# Altium PCB isokey_right.PcbDoc (part 2 of 2)
Units mm, origin at the board's own origin, x right, y up, seen from the top; angles counter-clockwise.
Board outline 380.25 x 127.5 mm, 2 copper layers (Top Layer, Bottom Layer), stack 1.569 mm thick; 152 components, 91 nets, 418 pads, 0 vias.
Unrouted connection lines stored in the file: 221.
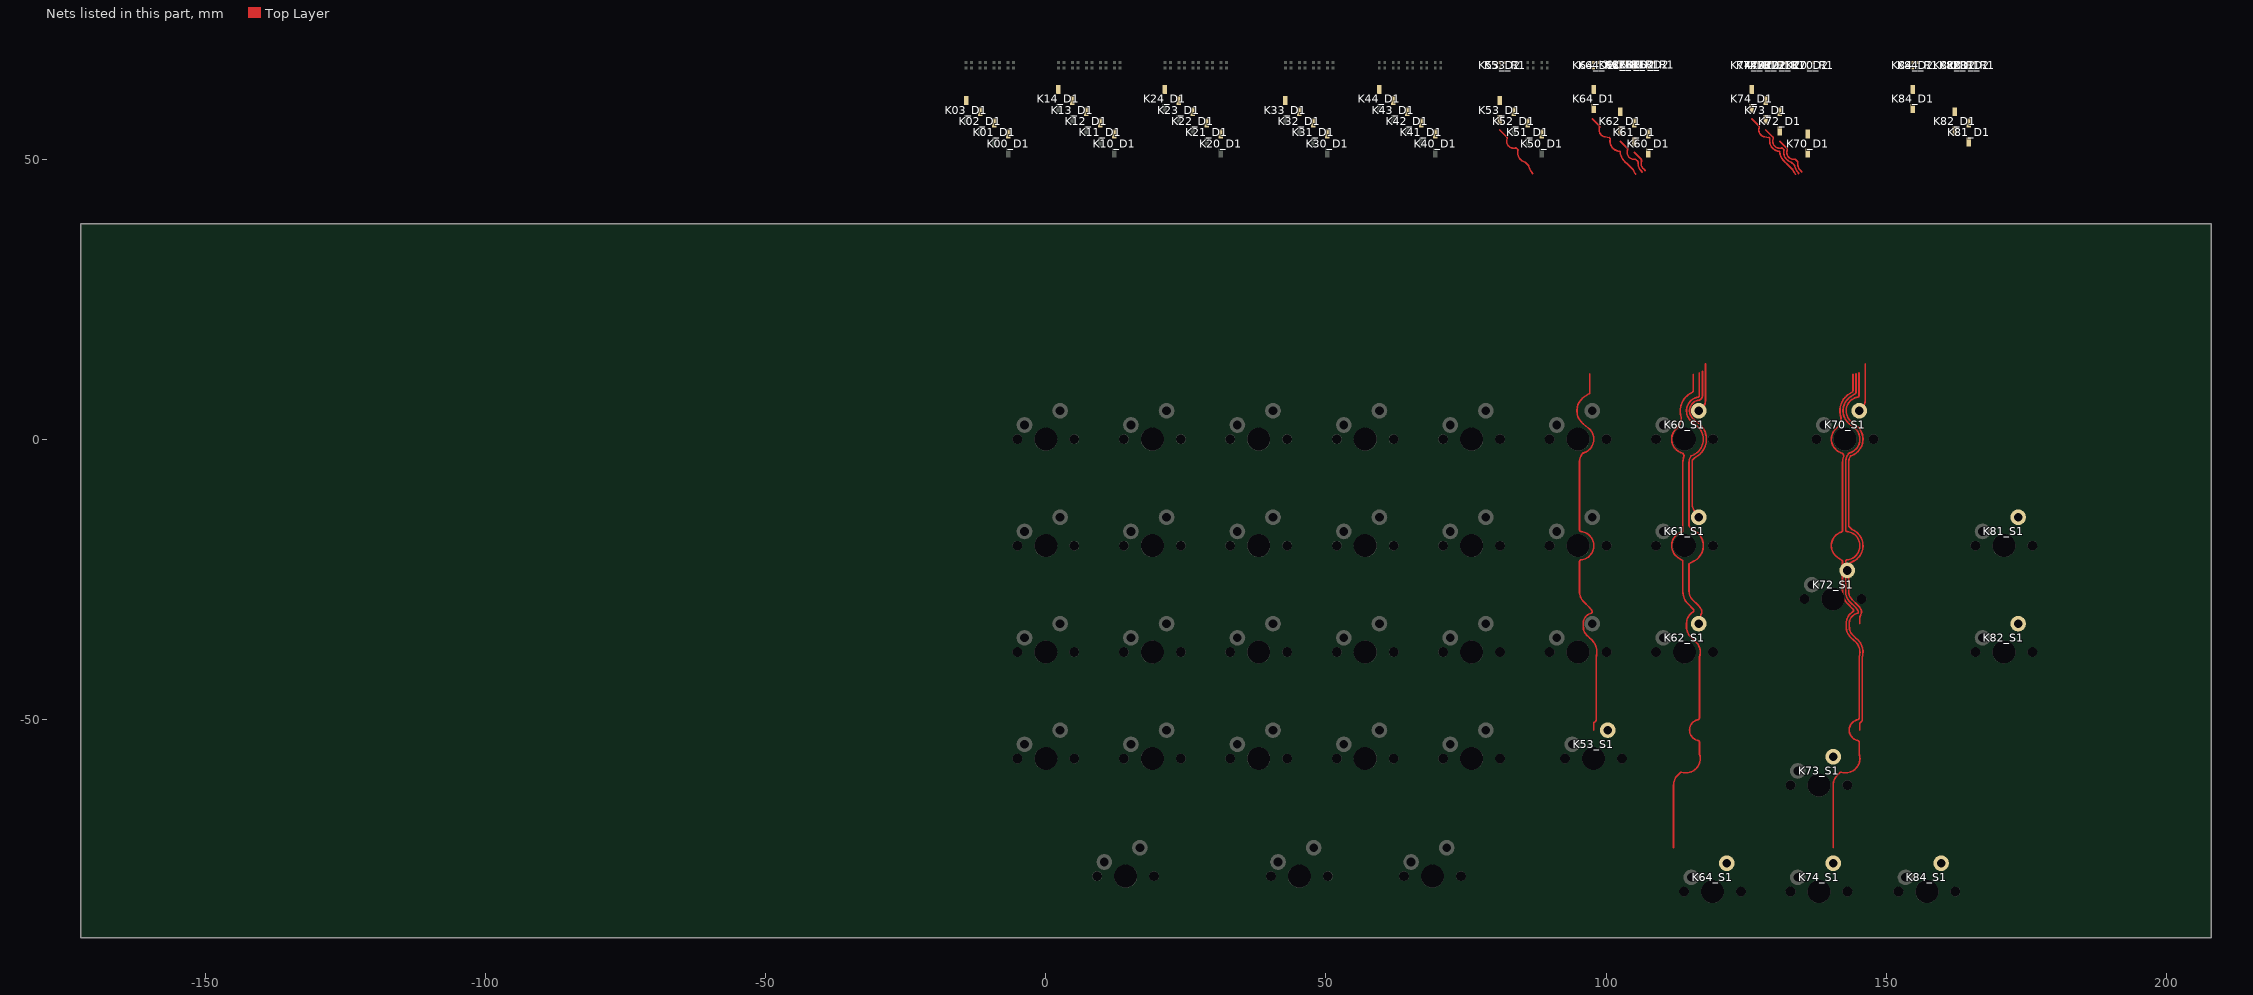
[diagram p2: the nets of this part, all layers, seen from the top]

## Nets (pads, with @x,y where several pads share a name; then routed paths per layer and width w, separated by ;. In a path a pad name is that pad's centre, name@x,y a point inside that pad or via, vN(x,y) a via of type N, cw(c..) or ccw(c..) an arc to the next point about the centre after c; other vN are vias at no path point) (continued)
NetK53_D1_2: K53_D1.2 K53_D2.2 K53_S1.2 | length 83.6
  Top Layer w0.3: 81,55.2 82.257,53.943 cw(c82.044,53.732) 82.326,53.629 ccw(c83.5,53.2) 83.755,51.976 cw(c83.815,51.682) 84.028,51.895 84.259,51.663 ; 84.26,51.662 ccw(c86,51.2) 85.549,49.457 86.115,48.891 cw(c85.901,48.681) 86.195,48.74 ccw(c88.5,49.2) 86.771,47.608 cw(c86.55,47.406) 86.85,47.407 ; 95.897,-32.763 cw(c97.79,-32.92) 97.307,-31.082 ccw(c97.229,-30.793) 97.495,-30.653 ccw(c95.25,-31.842) 97.046,-30.046 95.994,-28.994 cw(c97.79,-27.198) 95.25,-27.198 95.25,-21.833 cw(c95.55,-21.834) 95.518,-21.536 ccw(c95.25,-19) 95.517,-16.464 cw(c95.55,-16.166) 95.25,-16.167 95.25,-4.11 cw(c97.79,-4.11) 95.777,-2.562 cw(c96.014,-2.746) 95.932,-2.457 ccw(c95.25,0) 96.627,-2.146 ccw(c95.25,0) 96.823,2.007 95.91,2.722 cw(c96.095,2.958) 95.883,2.746 95.737,2.892 cw(c97.79,5.08) 96.208,7.629 96.958,8.095 ccw(c96.8,8.35) 97.1,8.346 97.1,8.348 97.1,11.657 ; 95.952,-32.439 ccw(c97.79,-32.92) 95.895,-33.054 95.897,-33.091 95.952,-33.939 ccw(c96.251,-33.919) 95.961,-33.993 ccw(c97.886,-33.493) 96.294,-34.686 ; 96.011,-34.157 ccw(c97.886,-33.493) 96.481,-34.901 97.055,-35.476 ccw(c97.266,-35.262) 97.087,-35.503 cw(c95.25,-38) 98.309,-37.5 cw(c95.25,-38) 98.229,-38.856 ccw(c98.518,-38.938) 98.218,-38.937 98.218,-50.025 cw(c97.668,-50.024) 97.94,-50.502 ccw(c98.09,-50.762) 97.79,-50.761 97.79,-51.92
NetK53_D2_1: K53_D2.1 K53_R1.2
NetK60_D1_2: K60_D1.2 K60_D2.2 K60_S1.2 | length 8.7
  Top Layer w0.3: K60_S1.2@116.79,5.08 117.006,5.296 ccw(c115.21,7.092) 117.75,7.092 117.75,13.45
NetK60_D2_1: K60_D2.1 K60_R1.2
NetK61_D1_2: K61_D1.2 K61_D2.2 K61_S1.2 | length 34.7
  Top Layer w0.3: 105,51.2 106.256,49.944 106.257,49.943 cw(c106.043,49.733) 106.329,49.644 106.306,49.571 ccw(c107.5,49.2) 106.815,48.154 cw(c106.65,47.904) 106.95,47.904 ; 115.258,3.956 ccw(c116.79,5.08) 115.666,3.548 ; 116.231,3.085 116.499,2.875 cw(c114.25,0) 115.808,-3.301 115.544,-3.565 ccw(c117.34,-5.361) 115.455,-3.658 ccw(c115.678,-3.859) 115.386,-3.791 ccw(c116.79,-4.11) 115.35,-4.11 115.35,-11.428 ccw(c117.89,-11.428) 116.094,-13.224 K61_S1.2@116.79,-13.92 ; 116.231,3.085 115.913,3.345 115.666,3.548 ; 116.35,6.928 cw(c116.79,5.08) 116.573,6.968 ; 117.2,12.154 117.2,7.795 cw(c116.35,7.795) 117.043,7.302 cw(c116.35,7.795) 117.017,7.268 cw(c116.35,7.795) 116.877,7.128 116.841,7.099 cw(c116.35,7.719) 116.65,6.987 cw(c116.537,7.265) 116.573,6.968 ; 115.666,3.548 cw(c116.79,5.08) 116.573,6.968
NetK61_D2_1: K61_D2.1 K61_R1.2
NetK62_D1_2: K62_D1.2 K62_D2.2 K62_S1.2 | length 58.7
  Top Layer w0.3: 102.5,53.2 103.757,51.943 ; 103.757,51.943 cw(c103.544,51.732) 103.826,51.629 ccw(c105,51.2) 105.255,49.976 105.622,49.609 cw(c105.409,49.398) 105.708,49.37 ccw(c107.5,49.2) 105.814,48.57 ccw(c107.5,49.2) 106.3,47.858 cw(c106.1,47.635) 106.4,47.635 ; 115.075,3.33 ccw(c116.79,5.08) 115.115,3.292 ; 116.65,11.885 116.65,7.795 cw(c116.35,7.795) 116.399,7.499 ccw(c116.79,5.08) 115.115,3.292 ; K62_S1.2@116.79,-32.92 K62_S1.2@116.79,-31.842 ; K62_S1.2@116.79,-31.841 cw(c117.09,-31.842) 116.806,-31.747 117.035,-31.063 ccw(c116.229,-30.793) 116.98,-30.395 ccw(c114.25,-31.842) 116.434,-29.656 115.384,-28.606 cw(c116.79,-27.198) 114.8,-27.198 114.8,-22.217 115.703,-21.739 ccw(c114.25,-19) 116.979,-17.529 ccw(c114.25,-19) 115.433,-16.135 cw(c115.549,-15.858) 115.339,-16.072 114.887,-15.62 cw(c115.1,-15.409) 114.8,-15.409 114.8,-4.11 cw(c116.79,-4.11) 115.103,-3.055 cw(c115.357,-3.215) 115.258,-2.931 ccw(c114.25,0) 115.963,-2.584 ccw(c114.25,0) 116.161,2.441 115.275,3.135 cw(c115.461,3.371) 115.25,3.158 115.128,3.28 ccw(c114.737,2.892) 115.115,3.292
NetK62_D2_1: K62_D2.1 K62_R1.2
NetK64_D1_2: K64_D1.2 K64_D2.2 K64_S1.2 | length 108.9
  Top Layer w0.3: 97.5,57.2 98.757,55.943 ; 98.757,55.943 cw(c98.544,55.732) 98.826,55.629 ccw(c100,55.2) 99.799,53.966 100.584,53.838 100.655,53.758 cw(c100.431,53.559) 100.726,53.505 ccw(c102.5,53.2) 102.5,51.4 ccw(c104.78,51.4) 102.892,50.121 103.054,49.882 ccw(c105,51.2) 103.713,49.234 cw(c103.548,48.983) 103.76,49.195 104.748,48.208 cw(c104.535,47.996) 104.813,48.11 ccw(c107.5,49.2) 105.3,47.311 ; 112.04,-72.92 112.04,-61.752 cw(c114.58,-61.752) 112.784,-59.956 113.223,-59.517 cw(c113.434,-59.731) 113.519,-59.443 ccw(c114.25,-57) 116.668,-56.19 116.668,-54.079 ccw(c116.368,-54.079) 116.425,-53.785 cw(c116.79,-51.92) 116.427,-50.055 ccw(c116.368,-49.761) 116.668,-49.761 116.668,-38.856 ; 115.55,11.561 115.55,8.656 cw(c115.25,8.656) 115.409,8.401 114.918,8.096 ccw(c116.79,5.08) 113.24,5.08 ccw(c117.405,5.08) 113.415,3.886 113.415,3.885 cw(c113.127,3.8) 113.427,3.798 cw(c110.827,3.844) 112.629,1.969 ccw(c114.25,0) 113.277,-2.357 113.622,-2.5 cw(c113.508,-2.777) 113.674,-2.527 113.714,-2.554 cw(c112.875,-3.247) 113.883,-2.838 cw(c113.605,-2.95) 113.887,-3.051 ccw(c116.79,-4.11) 113.7,-4.11 113.7,-16.28 cw(c113.4,-16.28) 113.49,-16.566 ccw(c114.25,-19) 112.886,-21.155 113.56,-21.582 cw(c113.4,-21.835) 113.7,-21.835 113.7,-27.198 ccw(c116.79,-27.198) 114.606,-29.384 115.579,-30.357 ; 115.579,-30.357 cw(c115.366,-30.568) 115.522,-30.824 ccw(c116.79,-32.92) 114.346,-33.088 cw(c114.047,-33.109) 114.346,-33.109 114.346,-33.493 ccw(c116.886,-33.493) 115.09,-35.289 115.697,-35.895 ccw(c115.908,-35.682) 115.732,-35.925 cw(c114.25,-38) 116.681,-37.231 cw(c114.25,-38) 116.682,-38.768
NetK64_D2_1: K64_D2.1 K64_R1.2
NetK70_D1_2: K70_D1.2 K70_D2.2 K70_S1.2 | length 8.7
  Top Layer w0.3: K70_S1.2@145.29,5.08 145.506,5.296 ccw(c143.71,7.092) 146.25,7.092 146.25,13.45
NetK70_D2_1: K70_D2.1 K70_R1.2
NetK72_D1_2: K72_D1.2 K72_D2.2 K72_S1.2 | length 58.7
  Top Layer w0.3: 131,53.2 132.257,51.943 cw(c132.044,51.732) 132.326,51.629 ccw(c133.5,51.2) 133.755,49.976 134.122,49.609 cw(c133.909,49.398) 134.208,49.37 ccw(c136,49.2) 134.314,48.57 ccw(c136,49.2) 134.8,47.858 cw(c134.6,47.635) 134.9,47.635 ; 143.575,3.33 ccw(c145.29,5.08) 143.615,3.292 ; 145.15,11.885 145.15,7.795 cw(c144.85,7.795) 144.899,7.499 ccw(c145.29,5.08) 143.615,3.292 ; 145.29,-32.92 145.29,-31.842 ; 145.29,-31.841 cw(c145.59,-31.842) 145.306,-31.747 145.535,-31.063 ccw(c144.729,-30.793) 145.48,-30.395 ccw(c142.75,-31.842) 144.934,-29.656 143.884,-28.606 cw(c145.29,-27.198) 143.3,-27.198 143.3,-22.217 144.203,-21.739 ccw(c142.75,-19) 145.479,-17.529 ccw(c142.75,-19) 143.933,-16.135 cw(c144.049,-15.858) 143.839,-16.072 143.387,-15.62 cw(c143.6,-15.409) 143.3,-15.409 143.3,-4.11 cw(c145.29,-4.11) 143.603,-3.055 cw(c143.857,-3.215) 143.758,-2.931 ccw(c142.75,0) 144.463,-2.584 ccw(c142.75,0) 144.661,2.441 143.775,3.135 cw(c143.961,3.371) 143.75,3.158 143.628,3.28 ccw(c143.237,2.892) 143.615,3.292
NetK72_D2_1: K72_D2.1 K72_R1.2
NetK73_D1_2: K73_D1.2 K73_D2.2 K73_S1.2 | length 83.6
  Top Layer w0.3: 128.5,55.2 129.757,53.943 cw(c129.544,53.732) 129.826,53.629 ccw(c131,53.2) 131.255,51.976 cw(c131.315,51.682) 131.528,51.895 131.759,51.663 ; 131.76,51.662 ccw(c133.5,51.2) 133.049,49.457 133.615,48.891 cw(c133.401,48.681) 133.695,48.74 ccw(c136,49.2) 134.271,47.608 cw(c134.05,47.406) 134.35,47.407 ; 143.397,-32.763 cw(c145.29,-32.92) 144.807,-31.082 ccw(c144.729,-30.793) 144.995,-30.653 ccw(c142.75,-31.842) 144.546,-30.046 143.494,-28.994 cw(c145.29,-27.198) 142.75,-27.198 142.75,-21.833 cw(c143.05,-21.834) 143.018,-21.536 ccw(c142.75,-19) 143.017,-16.464 cw(c143.05,-16.166) 142.75,-16.167 142.75,-4.11 cw(c145.29,-4.11) 143.277,-2.562 cw(c143.514,-2.746) 143.432,-2.457 ccw(c142.75,0) 144.127,-2.146 ccw(c142.75,0) 144.323,2.007 143.41,2.722 cw(c143.595,2.958) 143.383,2.746 143.237,2.892 cw(c145.29,5.08) 143.708,7.629 144.458,8.095 ccw(c144.3,8.35) 144.6,8.346 144.6,8.348 144.6,11.657 ; 143.452,-32.439 ccw(c145.29,-32.92) 143.395,-33.054 143.397,-33.091 143.452,-33.939 ccw(c143.751,-33.919) 143.461,-33.993 ccw(c145.386,-33.493) 143.794,-34.686 ; 143.511,-34.157 ccw(c145.386,-33.493) 143.981,-34.901 144.555,-35.476 ccw(c144.766,-35.262) 144.587,-35.503 cw(c142.75,-38) 145.809,-37.5 cw(c142.75,-38) 145.729,-38.856 ccw(c146.018,-38.938) 145.718,-38.937 145.718,-50.025 cw(c145.168,-50.024) 145.44,-50.502 ccw(c145.59,-50.762) 145.29,-50.761 145.29,-51.92
NetK73_D2_1: K73_D2.1 K73_R1.2
NetK74_D1_2: K74_D1.2 K74_D2.2 K74_S1.2 | length 108.9
  Top Layer w0.3: 126,57.2 127.257,55.943 cw(c127.044,55.732) 127.326,55.629 ccw(c128.5,55.2) 128.299,53.966 129.084,53.838 129.155,53.758 cw(c128.931,53.559) 129.226,53.505 ; 129.226,53.505 ccw(c131,53.2) 131,51.4 ccw(c133.28,51.4) 131.392,50.121 131.554,49.882 ccw(c133.5,51.2) 132.213,49.234 cw(c132.048,48.983) 132.26,49.195 133.248,48.208 cw(c133.035,47.996) 133.313,48.11 ccw(c136,49.2) 133.8,47.311 ; 140.54,-72.92 140.54,-61.752 cw(c143.08,-61.752) 141.284,-59.956 141.723,-59.517 cw(c141.934,-59.731) 142.019,-59.443 ccw(c142.75,-57) 145.168,-56.19 145.168,-54.079 ccw(c144.868,-54.079) 144.925,-53.785 cw(c145.29,-51.92) 144.927,-50.055 ccw(c144.868,-49.761) 145.168,-49.761 145.168,-38.856 ; 144.05,11.561 144.05,8.656 cw(c143.75,8.656) 143.909,8.401 143.418,8.096 ccw(c145.29,5.08) 141.74,5.08 ccw(c145.905,5.08) 141.915,3.886 141.915,3.885 cw(c141.627,3.8) 141.927,3.798 cw(c139.327,3.844) 141.129,1.969 ccw(c142.75,0) 141.777,-2.357 142.122,-2.5 cw(c142.008,-2.777) 142.174,-2.527 142.214,-2.554 cw(c141.375,-3.247) 142.383,-2.838 cw(c142.105,-2.95) 142.387,-3.051 ccw(c145.29,-4.11) 142.2,-4.11 142.2,-16.28 cw(c141.9,-16.28) 141.99,-16.566 ccw(c142.75,-19) 141.386,-21.155 142.06,-21.582 cw(c141.9,-21.835) 142.2,-21.835 142.2,-27.198 ccw(c145.29,-27.198) 143.106,-29.384 144.079,-30.357 ; 144.079,-30.357 cw(c143.866,-30.568) 144.022,-30.824 ccw(c145.29,-32.92) 142.846,-33.088 cw(c142.546,-33.109) 142.846,-33.109 142.846,-33.493 ccw(c145.386,-33.493) 143.59,-35.289 144.197,-35.895 ccw(c144.408,-35.682) 144.232,-35.925 cw(c142.75,-38) 145.181,-37.231 cw(c142.75,-38) 145.182,-38.768
NetK74_D2_1: K74_D2.1 K74_R1.2
NetK81_D1_2: K81_D1.2 K81_D2.2 K81_S1.2
NetK81_D2_1: K81_D2.1 K81_R1.2
NetK82_D1_2: K82_D1.2 K82_D2.2 K82_S1.2
NetK82_D2_1: K82_D2.1 K82_R1.2
NetK84_D1_2: K84_D1.2 K84_D2.2 K84_S1.2
NetK84_D2_1: K84_D2.1 K84_R1.2
R0: K00_D1.1 K10_D1.1 K20_D1.1 K30_D1.1 K40_D1.1 K50_D1.1 K60_D1.1 K70_D1.1
R1: K01_D1.1 K11_D1.1 K21_D1.1 K31_D1.1 K41_D1.1 K51_D1.1 K61_D1.1 K81_D1.1
R2: K02_D1.1 K12_D1.1 K22_D1.1 K32_D1.1 K42_D1.1 K52_D1.1 K62_D1.1 K72_D1.1 K82_D1.1
R3: K03_D1.1 K13_D1.1 K23_D1.1 K33_D1.1 K43_D1.1 K53_D1.1 K73_D1.1
R4: K14_D1.1 K24_D1.1 K44_D1.1 K64_D1.1 K74_D1.1 K84_D1.1
pads on no net: K00_S1.Hole K01_S1.Hole K02_S1.Hole K03_S1.Hole K10_S1.Hole K11_S1.Hole K12_S1.Hole K13_S1.Hole K14_S1.Hole K20_S1.Hole K21_S1.Hole K22_S1.Hole K23_S1.Hole K24_S1.Hole K30_S1.Hole K31_S1.Hole K32_S1.Hole K33_S1.Hole K40_S1.Hole K41_S1.Hole K42_S1.Hole K43_S1.Hole K44_S1.Hole K50_S1.Hole K51_S1.Hole K52_S1.Hole K53_S1.Hole K60_S1.Hole K61_S1.Hole K62_S1.Hole K64_S1.Hole K70_S1.Hole K72_S1.Hole K73_S1.Hole K74_S1.Hole K81_S1.Hole K82_S1.Hole K84_S1.Hole

## Silkscreen, mask and mechanical layers (free items; w line width, h text height)
Top Overlay:
  text "REV..prj_pcb" at -268.836,-51.176 h3
  text ".prj_name / .prj_status" at -274.336,-62.676 h2
Bottom Overlay:
  text "REV..prj_pcb" at -254.086,-54.176 h3
  text ".prj_name / .prj_status" at -251.336,-63.676 h2
Drawing:
  drawing of 2202 lines, arcs and shapes, not listed
  text "'.Layer_Name'" at 375.3,-211.053 h5
Assembly Top:
  text "'.Layer_Name'" at 375.3,-210.934 h5
Assembly Bottom:
  text "'.Layer_Name'" at 115.114,-211.342 h5
Note Top:
  text "'.Layer_Name'" at 375.3,-210.934 h5
Note Bottom:
  text "'.Layer_Name'" at 115.114,-211.175 h5
PCB_Note:
  drawing of 143 lines, arcs and shapes, not listed
  text "REV:" at 57.914,85.574 h0.8
  text "DWG. NO." at 33.354,85.495 h0.8
  text "1" at -284.049,85.112 h1.2
  text "2" at -257.049,85.112 h1.2
  text "3" at -232.049,85.112 h1.2
  text "4" at -207.049,85.112 h1.2
  text "5" at -182.049,85.112 h1.2
  text "6" at -157.049,85.112 h1.2
  text "7" at -132.049,85.112 h1.2
  text "8" at -105.049,85.112 h1.2
  text "9" at -76.049,85.112 h1.2
  text "10" at -51.049,85.112 h1.2
  text "11" at -26.049,85.112 h1.2
  text "12" at -1.049,85.112 h1.2
  text "13" at 23.951,85.112 h1.2
  text "15" at 73.951,85.112 h1.2
  text "16" at 103.951,85.112 h1.2
  text ".prj_pcb" at 58.164,84.074 h1.27
  text ".PCB_DWG_NO" at 36.664,83.824 h1.27
  text "T" at -295.031,81.486 h1.3
  text "H" at -293.93,81.486 h1.3
  text "I" at -292.66,81.486 h1.3
  text "S" at -292.152,81.486 h1.3
  text "D" at -290.5,81.486 h1.3
  text "O" at -289.23,81.486 h1.3
  text "C" at -287.833,81.486 h1.3
  text "U" at -286.562,81.486 h1.3
  text "M" at -285.292,81.486 h1.3
  text "E" at -283.81,81.486 h1.3
  text "N" at -282.624,81.486 h1.3
  text "T" at -281.396,81.486 h1.3
  text "A" at -279.787,81.486 h1.3
  text "N" at -278.602,81.486 h1.3
  text "D" at -277.331,81.486 h1.3
  text "T" at -275.595,81.486 h1.3
  text "H" at -274.494,81.486 h1.3
  text "E" at -273.224,81.486 h1.3
  text "D" at -271.573,81.486 h1.3
  text "A" at -270.302,81.486 h1.3
  text "T" at -269.117,81.486 h1.3
  text "A" at -268.058,81.486 h1.3
  text "D" at -266.364,81.486 h1.3
  text "I" at -265.094,81.486 h1.3
  text "S" at -264.628,81.486 h1.3
  text "C" at -263.443,81.486 h1.3
  text "L" at -262.172,81.486 h1.3
  text "O" at -261.198,81.486 h1.3
  text "S" at -259.801,81.486 h1.3
  text "E" at -258.615,81.486 h1.3
  text "D" at -257.43,81.486 h1.3
  text "H" at -255.694,81.486 h1.3
  text "E" at -254.423,81.486 h1.3
  text "R" at -253.238,81.486 h1.3
  text "E" at -252.01,81.486 h1.3
  text "I" at -250.824,81.486 h1.3
  text "N" at -250.316,81.486 h1.3
  text "O" at -248.58,81.486 h1.3
  text "R" at -247.183,81.486 h1.3
  text "REVISIONS" at 57.851,80.657 h1.5
  text "H" at -295.031,79.453 h1.3
  text "E" at -293.761,79.453 h1.3
  text "R" at -292.575,79.453 h1.3
  text "E" at -291.305,79.453 h1.3
  text "W" at -290.162,79.453 h1.3
  text "I" at -288.425,79.453 h1.3
  text "T" at -287.96,79.453 h1.3
  text "H" at -286.859,79.453 h1.3
  text "I" at -285.123,79.453 h1.3
  text "S" at -284.615,79.453 h1.3
  text "T" at -282.963,79.453 h1.3
  text "H" at -281.862,79.453 h1.3
  text "E" at -280.592,79.453 h1.3
  text "P" at -278.94,79.453 h1.3
  text "R" at -277.755,79.453 h1.3
  text "O" at -276.485,79.453 h1.3
  text "P" at -275.112,79.453 h1.3
  text "E" at -273.926,79.453 h1.3
  text "R" at -272.74,79.453 h1.3
  text "T" at -271.512,79.453 h1.3
  text "Y" at -270.412,79.453 h1.3
  text "O" at -268.76,79.453 h1.3
  text "F" at -267.405,79.453 h1.3
  text "A" at -265.796,79.453 h1.3
  text "L" at -264.61,79.453 h1.3
  text "T" at -263.679,79.453 h1.3
  text "I" at -262.578,79.453 h1.3
  text "U" at -262.07,79.453 h1.3
  text "M" at -260.8,79.453 h1.3
  text "L" at -258.852,79.453 h1.3
  text "I" at -257.878,79.453 h1.3
  text "M" at -257.37,79.453 h1.3
  text "I" at -255.93,79.453 h1.3
  text "T" at -255.422,79.453 h1.3
  text "E" at -254.321,79.453 h1.3
  text "D" at -253.135,79.453 h1.3
  text "A" at -251.399,79.453 h1.3
  text "N" at -250.214,79.453 h1.3
  text "D" at -248.943,79.453 h1.3
  text "M" at -247.165,79.453 h1.3
  text "A" at -245.683,79.453 h1.3
  text "Y" at -244.54,79.453 h1.3
  text "ZONE" at 17.592,77.482 h1.5
  text "REV" at 25.974,77.482 h1.5
  text "DATE" at 87.442,77.482 h1.5
  text "B" at -295.031,77.421 h1.3
  text "E" at -293.845,77.421 h1.3
  text "F" at -292.152,77.421 h1.3
  text "R" at -291.051,77.421 h1.3
  text "E" at -289.78,77.421 h1.3
  text "E" at -288.637,77.421 h1.3
  text "L" at -287.452,77.421 h1.3
  text "Y" at -286.478,77.421 h1.3
  text "D" at -284.784,77.421 h1.3
  text "I" at -283.514,77.421 h1.3
  text "S" at -283.048,77.421 h1.3
  text "T" at -281.862,77.421 h1.3
  text "R" at -280.779,77.421 h1.3
  text "I" at -279.551,77.421 h1.3
  text "B" at -279.043,77.421 h1.3
  text "U" at -277.857,77.421 h1.3
  text "T" at -276.587,77.421 h1.3
  text "E" at -275.486,77.421 h1.3
  text "D" at -274.3,77.421 h1.3
  text "I" at -272.564,77.421 h1.3
  text "N" at -272.056,77.421 h1.3
  text "W" at -270.362,77.421 h1.3
  text "H" at -268.626,77.421 h1.3
  text "O" at -267.398,77.421 h1.3
  text "L" at -266.001,77.421 h1.3
  text "E" at -265.027,77.421 h1.3
  text "." at -263.841,77.421 h1.3
  text "N" at -262.867,77.421 h1.3
  text "O" at -261.597,77.421 h1.3
  text "R" at -259.692,77.421 h1.3
  text "I" at -258.464,77.421 h1.3
  text "G" at -257.955,77.421 h1.3
  text "H" at -256.558,77.421 h1.3
  text "T" at -255.33,77.421 h1.3
  text "S" at -254.229,77.421 h1.3
  text "A" at -252.578,77.421 h1.3
  text "R" at -251.392,77.421 h1.3
  text "E" at -250.122,77.421 h1.3
  text "DESCRIPTION" at 51.755,77.355 h1.5
  text "APPROVED" at 100.269,77.355 h1.5
  text "R" at -295.031,75.388 h1.3
  text "E" at -293.761,75.388 h1.3
  text "S" at -292.575,75.388 h1.3
  text "E" at -291.39,75.388 h1.3
  text "R" at -290.204,75.388 h1.3
  text "V" at -288.934,75.388 h1.3
  text "E" at -287.748,75.388 h1.3
  text "D" at -286.562,75.388 h1.3
  text "O" at -284.826,75.388 h1.3
  text "R" at -283.429,75.388 h1.3
  text "E" at -281.65,75.388 h1.3
  text "X" at -280.465,75.388 h1.3
  text "P" at -279.322,75.388 h1.3
  text "R" at -278.136,75.388 h1.3
  text "E" at -276.866,75.388 h1.3
  text "S" at -275.68,75.388 h1.3
  text "S" at -274.494,75.388 h1.3
  text "O" at -272.843,75.388 h1.3
  text "R" at -271.446,75.388 h1.3
  text "I" at -269.71,75.388 h1.3
  text "M" at -269.201,75.388 h1.3
  text "P" at -267.719,75.388 h1.3
  text "L" at -266.534,75.388 h1.3
  text "I" at -265.602,75.388 h1.3
  text "E" at -265.094,75.388 h1.3
  text "D" at -263.908,75.388 h1.3
  text "W" at -262.215,75.388 h1.3
  text "A" at -260.479,75.388 h1.3
  text "R" at -259.293,75.388 h1.3
  text "A" at -258.023,75.388 h1.3
  text "N" at -256.837,75.388 h1.3
  text "T" at -255.609,75.388 h1.3
  text "E" at -254.508,75.388 h1.3
  text "E" at -253.322,75.388 h1.3
  text "G" at -251.767,75.388 h1.3
  text "I" at -250.369,75.388 h1.3
  text "V" at -249.861,75.388 h1.3
  text "E" at -248.676,75.388 h1.3
  text "N" at -247.49,75.388 h1.3
  text "." at -246.262,75.388 h1.3
  text "A" at 26.736,74.053 h1.5
  text "ORIGINAL" at 53.66,74.053 h1.5
  text "A" at -297.049,64.112 h1.2
  text "A" at 114.951,64.112 h1.2
  text "PCB Build Notes:" at -282.036,45.624 h3
  text "B" at -297.049,31.112 h1.2
  text "B" at 114.951,31.112 h1.2
  text "1. Layers: '.pcb_layer_count' / 2. Base Material: '.pcb_material' / 3. Plating Finish: '.pcb_finish' / 4. Silkscreen Color: '.pcb_silkscreen_color' / 5. Solder Color: '.pcb_solder_color'" at -278.486,21.824 h2.5
  text "Other Notes:" at -281.336,14.624 h3
  text "A  Differential Pair 90ohm +/- 10%" at -278.136,9.438 h2.5
  text "B  Single Ended 50ohm +/- 10%" at -278.136,5.123 h2.5
  text "C  Differential Pair 100ohm +/- 10%" at -278.136,0.331 h2.5
  text "C" at -297.049,-4.763 h1.2
  text "C" at 114.951,-4.763 h1.2
  text "D" at -297.049,-40.638 h1.2
  text "D" at 114.951,-40.638 h1.2
  text "E" at -297.049,-76.513 h1.2
  text "E" at 114.951,-76.513 h1.2
  text "F" at -297.049,-112.388 h1.2
  text "F" at 114.951,-112.388 h1.2
  text "PROJECT" at 1.105,-147.798 h1.2
  text "DATE" at 25.949,-147.798 h1.2
  text ".pcb_organization" at 82.311,-147.872 h1.2
  text "G" at -297.049,-148.263 h1.2
  text "G" at 114.951,-148.263 h1.2
  text "BOARD:" at -17.523,-149.83 h1.2
  text ".pcb_address1" at 82.311,-150.158 h1.2
  text ".prj_name" at -15.645,-151.862 h1.25
  text ".prj_date" at 22.647,-151.862 h1
  text ".pcb_address2" at 82.311,-152.444 h1.2
  text "'.pcb_address3' - '.pcb_address4'" at 82.311,-154.73 h1.2
  text "STATUS:" at -17.523,-154.91 h1.2
  text "-  '.prj_status' -" at -15.595,-157.34 h1.5
  text "TITLE:" at 34.432,-157.725 h1.2
  text "VARIANT:" at -17.523,-159.99 h1.2
  text "PART NO." at -52.466,-160.676 h1.2
  text ".prj_part_number" at -39.512,-160.676 h1.2
  text ".prj_name_long" at 38.75,-161.535 h2.54
  text ".VariantName" at -15.645,-162.59 h1.25
  text "PCB PART NO." at -52.466,-162.782 h1.2
  text ".pcb_part_number" at -39.512,-162.782 h1.2
  text "DWG. NO." at 114.835,-163.49 h0.8 r270
  text "UNLESS OTHERWISE SPECIFIED DIMENSIONS" at -51.958,-165.449 h1.1
  text "APPROVALS" at 1.105,-165.502 h1.2
  text "DATE" at 25.949,-165.502 h1.2
  text ".pcb_title1" at 38.75,-166.708 h2.54
  text ".PCB_DWG_NO" at 113.164,-166.801 h1.27 r270
  text "AND TOLERANCE ARE IN INCHES AND" at -50.561,-167.354 h1.1
  text "DESIGNER:" at -17.523,-167.534 h1.2
  text "APPLY TO THE FINISHED PART" at -47.767,-169.132 h1.1
  text ".PCB_DESIGNER" at -15.645,-169.566 h1.25
  text ".PCB_DESIGNER_APP_DATE" at 22.647,-169.566 h1
  text ".pcb_title2" at 38.75,-171.208 h2.54
  text "TOLERANCE ON:" at -41.671,-172.307 h1.2
  text "ENGINEER:" at -17.523,-172.614 h1.2
  text ".PCB_ENGINEER_APP_DATE" at 22.647,-174.392 h1
  text "2 DEC. PLACE" at -51.958,-174.593 h1
  text "3 DEC. PLACE" at -40.401,-174.593 h1
  text "ANGLES" at -26.812,-174.593 h1
  text ".PCB_ENGINEER" at -15.645,-174.646 h1.25
  text "LICENSE:" at 34.432,-175.101 h1.2
  text "CHECKER:" at -17.523,-177.694 h1.2
  text ".PCB_2_DEC_TOL" at -50.561,-178.53 h1.5
  text ".PCB_3_DEC_TOL" at -39.512,-178.53 h1.5
  text ".PCB_ANG_TOL" at -27.701,-178.53 h1.5
  text ".prj_license" at 39,-178.96 h2.54
  text ".PCB_CHECKER_APP_DATE" at 22.596,-179.573 h1
  text ".PCB_CHECKER" at -15.645,-179.726 h1.25
  text "THIRD ANGLE PROJECTION" at -71.592,-180.056 h1
  text "MATERIAL:" at -51.958,-182.164 h1.2
  text "LAYER:" at 34.432,-183.178 h1.2
  text "REFERENCE DOCUMENTS" at -1.371,-183.282 h1.2
  text "H" at -297.049,-184.138 h1.2
  text "BOM:" at -17.523,-185.822 h1.2
  text "SEE NOTES" at -42.661,-187.219 h1.5
  text "REV:" at 114.914,-188.051 h0.8 r270
  text ".DOC_NO_BOM" at 4.105,-188.108 h1.5
  text ".prj_pcb" at 113.414,-188.301 h1.27 r270
  text "ASSY DWG:" at -17.523,-190.648 h1.2
  text ".DOC_NO_ASSY_DWG" at 4.105,-192.934 h1.5
  text "SIZE:" at 35.956,-193.77 h1.2
  text "CAGE CODE:" at 42.179,-193.77 h1.2
  text "DWG NO:" at 67.579,-193.77 h1.2
  text "REV:" at 107.203,-193.77 h1.2
  text "FAB DWG:" at -17.523,-195.474 h1.2
  text ".PCB_DWG_NO" at 72.914,-197.426 h2.54
  text ".DOC_NO_FAB_DWG" at 4.105,-197.633 h1.5
  text "A3" at 35.804,-197.695 h2.54
  text ".CAGE_CODE" at 46.497,-197.707 h2.54
  text ".prj_pcb" at 108.527,-197.695 h2.54
  text "SCHEMATIC:" at -17.523,-200.3 h1.2
  text "PRINT DATE:" at -52.161,-200.325 h1.2
  text "SCALE:" at 34.432,-201.771 h1.2
  text "FILE NAME:" at 49.799,-201.773 h1.2
  text "SHEET:" at 93.995,-201.773 h1.2
  text ".DOC_NO_SCH_DWG" at 4.105,-202.586 h1.5
  text "'.Print_Date', '.Print_Time'" at -49.586,-202.676 h1.5
  text ".PCB_FILE_NAME_NO_PATH" at 58.511,-202.916 h1.5
  text ".PCB_SCALE" at 41.29,-203.041 h1.5
  text "OF" at 105.425,-203.043 h1.2
  text "DOC-104 REV A" at -295.336,-204.745 h0.55
  text "1" at -284.049,-205.888 h1.2
  text "2" at -257.049,-205.888 h1.2
  text "3" at -232.049,-205.888 h1.2
  text "4" at -207.049,-205.888 h1.2
  text "5" at -182.049,-205.888 h1.2
  text "6" at -157.049,-205.888 h1.2
  text "7" at -132.049,-205.888 h1.2
  text "8" at -105.049,-205.888 h1.2
  text "9" at -76.049,-205.888 h1.2
  text "10" at -51.049,-205.888 h1.2
  text "11" at -26.049,-205.888 h1.2
  text "12" at -1.049,-205.888 h1.2
  text "13" at 23.951,-205.888 h1.2
  text "14" at 48.951,-205.888 h1.2
  text "15" at 73.951,-205.888 h1.2
  text "16" at 103.951,-205.888 h1.2
Top TitleBlock:
  drawing of 136 lines, arcs and shapes, not listed
  text "REV:" at 57.914,85.596 h0.8
  text "DWG. NO." at 33.354,85.517 h0.8
  text "1" at -284.049,85.133 h1.2
  text "2" at -257.049,85.133 h1.2
  text "3" at -232.049,85.133 h1.2
  text "4" at -207.049,85.133 h1.2
  text "5" at -182.049,85.133 h1.2
  text "6" at -157.049,85.133 h1.2
  text "7" at -132.049,85.133 h1.2
  text "8" at -105.049,85.133 h1.2
  text "9" at -76.049,85.133 h1.2
  text "10" at -51.049,85.133 h1.2
  text "11" at -26.049,85.133 h1.2
  text "12" at -1.049,85.133 h1.2
  text "13" at 23.951,85.133 h1.2
  text "15" at 73.951,85.133 h1.2
  text "16" at 103.951,85.133 h1.2
  text ".prj_pcb" at 58.164,84.096 h1.27
  text ".PCB_DWG_NO" at 36.664,83.846 h1.27
  text "T" at -295.031,81.507 h1.3
  text "H" at -293.93,81.507 h1.3
  text "I" at -292.66,81.507 h1.3
  text "S" at -292.152,81.507 h1.3
  text "D" at -290.5,81.507 h1.3
  text "O" at -289.23,81.507 h1.3
  text "C" at -287.833,81.507 h1.3
  text "U" at -286.562,81.507 h1.3
  text "M" at -285.292,81.507 h1.3
  text "E" at -283.81,81.507 h1.3
  text "N" at -282.624,81.507 h1.3
  text "T" at -281.396,81.507 h1.3
  text "A" at -279.787,81.507 h1.3
  text "N" at -278.602,81.507 h1.3
  text "D" at -277.331,81.507 h1.3
  text "T" at -275.595,81.507 h1.3
  text "H" at -274.494,81.507 h1.3
  text "E" at -273.224,81.507 h1.3
  text "D" at -271.573,81.507 h1.3
  text "A" at -270.302,81.507 h1.3
  text "T" at -269.117,81.507 h1.3
  text "A" at -268.058,81.507 h1.3
  text "D" at -266.364,81.507 h1.3
  text "I" at -265.094,81.507 h1.3
  text "S" at -264.628,81.507 h1.3
  text "C" at -263.443,81.507 h1.3
  text "L" at -262.172,81.507 h1.3
  text "O" at -261.198,81.507 h1.3
  text "S" at -259.801,81.507 h1.3
  text "E" at -258.615,81.507 h1.3
  text "D" at -257.43,81.507 h1.3
  text "H" at -255.694,81.507 h1.3
  text "E" at -254.423,81.507 h1.3
  text "R" at -253.238,81.507 h1.3
  text "E" at -252.01,81.507 h1.3
  text "I" at -250.824,81.507 h1.3
  text "N" at -250.316,81.507 h1.3
  text "O" at -248.58,81.507 h1.3
  text "R" at -247.183,81.507 h1.3
  text "REVISIONS" at 57.851,80.679 h1.5
  text "H" at -295.031,79.475 h1.3
  text "E" at -293.761,79.475 h1.3
  text "R" at -292.575,79.475 h1.3
  text "E" at -291.305,79.475 h1.3
  text "W" at -290.162,79.475 h1.3
  text "I" at -288.425,79.475 h1.3
  text "T" at -287.96,79.475 h1.3
  text "H" at -286.859,79.475 h1.3
  text "I" at -285.123,79.475 h1.3
  text "S" at -284.615,79.475 h1.3
  text "T" at -282.963,79.475 h1.3
  text "H" at -281.862,79.475 h1.3
  text "E" at -280.592,79.475 h1.3
  text "P" at -278.94,79.475 h1.3
  text "R" at -277.755,79.475 h1.3
  text "O" at -276.485,79.475 h1.3
  text "P" at -275.112,79.475 h1.3
  text "E" at -273.926,79.475 h1.3
  text "R" at -272.74,79.475 h1.3
  text "T" at -271.512,79.475 h1.3
  text "Y" at -270.412,79.475 h1.3
  text "O" at -268.76,79.475 h1.3
  text "F" at -267.405,79.475 h1.3
  text "A" at -265.796,79.475 h1.3
  text "L" at -264.61,79.475 h1.3
  text "T" at -263.679,79.475 h1.3
  text "I" at -262.578,79.475 h1.3
  text "U" at -262.07,79.475 h1.3
  text "M" at -260.8,79.475 h1.3
  text "L" at -258.852,79.475 h1.3
  text "I" at -257.878,79.475 h1.3
  text "M" at -257.37,79.475 h1.3
  text "I" at -255.93,79.475 h1.3
  text "T" at -255.422,79.475 h1.3
  text "E" at -254.321,79.475 h1.3
  text "D" at -253.135,79.475 h1.3
  text "A" at -251.399,79.475 h1.3
  text "N" at -250.214,79.475 h1.3
  text "D" at -248.943,79.475 h1.3
  text "M" at -247.165,79.475 h1.3
  text "A" at -245.683,79.475 h1.3
  text "Y" at -244.54,79.475 h1.3
  text "ZONE" at 17.592,77.504 h1.5
  text "REV" at 25.974,77.504 h1.5
  text "DATE" at 87.442,77.504 h1.5
  text "B" at -295.031,77.442 h1.3
  text "E" at -293.845,77.442 h1.3
  text "F" at -292.152,77.442 h1.3
  text "R" at -291.051,77.442 h1.3
  text "E" at -289.78,77.442 h1.3
  text "E" at -288.637,77.442 h1.3
  text "L" at -287.452,77.442 h1.3
  text "Y" at -286.478,77.442 h1.3
  text "D" at -284.784,77.442 h1.3
  text "I" at -283.514,77.442 h1.3
  text "S" at -283.048,77.442 h1.3
  text "T" at -281.862,77.442 h1.3
  text "R" at -280.779,77.442 h1.3
  text "I" at -279.551,77.442 h1.3
  text "B" at -279.043,77.442 h1.3
  text "U" at -277.857,77.442 h1.3
  text "T" at -276.587,77.442 h1.3
  text "E" at -275.486,77.442 h1.3
  text "D" at -274.3,77.442 h1.3
  text "I" at -272.564,77.442 h1.3
  text "N" at -272.056,77.442 h1.3
  text "W" at -270.362,77.442 h1.3
  text "H" at -268.626,77.442 h1.3
  text "O" at -267.398,77.442 h1.3
  text "L" at -266.001,77.442 h1.3
  text "E" at -265.027,77.442 h1.3
  text "." at -263.841,77.442 h1.3
  text "N" at -262.867,77.442 h1.3
  text "O" at -261.597,77.442 h1.3
  text "R" at -259.692,77.442 h1.3
  text "I" at -258.464,77.442 h1.3
  text "G" at -257.955,77.442 h1.3
  text "H" at -256.558,77.442 h1.3
  text "T" at -255.33,77.442 h1.3
  text "S" at -254.229,77.442 h1.3
  text "A" at -252.578,77.442 h1.3
  text "R" at -251.392,77.442 h1.3
  text "E" at -250.122,77.442 h1.3
  text "DESCRIPTION" at 51.755,77.377 h1.5
  text "APPROVED" at 100.269,77.377 h1.5
  text "R" at -295.031,75.41 h1.3
  text "E" at -293.761,75.41 h1.3
  text "S" at -292.575,75.41 h1.3
  text "E" at -291.39,75.41 h1.3
  text "R" at -290.204,75.41 h1.3
  text "V" at -288.934,75.41 h1.3
  text "E" at -287.748,75.41 h1.3
  text "D" at -286.562,75.41 h1.3
  text "O" at -284.826,75.41 h1.3
  text "R" at -283.429,75.41 h1.3
  text "E" at -281.65,75.41 h1.3
  text "X" at -280.465,75.41 h1.3
  text "P" at -279.322,75.41 h1.3
  text "R" at -278.136,75.41 h1.3
  text "E" at -276.866,75.41 h1.3
  text "S" at -275.68,75.41 h1.3
  text "S" at -274.494,75.41 h1.3
  text "O" at -272.843,75.41 h1.3
  text "R" at -271.446,75.41 h1.3
  text "I" at -269.71,75.41 h1.3
  text "M" at -269.201,75.41 h1.3
  text "P" at -267.719,75.41 h1.3
  text "L" at -266.534,75.41 h1.3
  text "I" at -265.602,75.41 h1.3
  text "E" at -265.094,75.41 h1.3
  text "D" at -263.908,75.41 h1.3
  text "W" at -262.215,75.41 h1.3
  text "A" at -260.479,75.41 h1.3
  text "R" at -259.293,75.41 h1.3
  text "A" at -258.023,75.41 h1.3
  text "N" at -256.837,75.41 h1.3
  text "T" at -255.609,75.41 h1.3
  text "E" at -254.508,75.41 h1.3
  text "E" at -253.322,75.41 h1.3
  text "G" at -251.767,75.41 h1.3
  text "I" at -250.369,75.41 h1.3
  text "V" at -249.861,75.41 h1.3
  text "E" at -248.676,75.41 h1.3
  text "N" at -247.49,75.41 h1.3
  text "." at -246.262,75.41 h1.3
  text "A" at 26.736,74.075 h1.5
  text "ORIGINAL" at 53.66,74.075 h1.5
  text "A" at -297.049,64.133 h1.2
  text "A" at 114.951,64.133 h1.2
  text "B" at -297.049,31.133 h1.2
  text "B" at 114.951,31.133 h1.2
  text "C" at -297.049,-4.742 h1.2
  text "C" at 114.951,-4.742 h1.2
  text "D" at -297.049,-40.617 h1.2
  text "D" at 114.951,-40.617 h1.2
  text "E" at -297.049,-76.492 h1.2
  text "E" at 114.951,-76.492 h1.2
  text "F" at -297.049,-112.367 h1.2
  text "F" at 114.951,-112.367 h1.2
  text "PROJECT" at 1.105,-147.798 h1.2
  text "DATE" at 25.949,-147.798 h1.2
  text ".pcb_organization" at 82.311,-147.872 h1.2
  text "G" at -297.049,-148.242 h1.2
  text "G" at 114.951,-148.242 h1.2
  text "BOARD:" at -17.523,-149.83 h1.2
  text ".pcb_address1" at 82.311,-150.158 h1.2
  text ".prj_name" at -15.645,-151.862 h1.25
  text ".prj_date" at 22.647,-151.862 h1
  text ".pcb_address2" at 82.311,-152.444 h1.2
  text "'.pcb_address3' - '.pcb_address4'" at 82.311,-154.73 h1.2
  text "STATUS:" at -17.523,-154.91 h1.2
  text "-  '.prj_status' -" at -15.595,-157.34 h1.5
  text "TITLE:" at 34.432,-157.725 h1.2
  text "VARIANT:" at -17.523,-159.99 h1.2
  text "PART NO." at -52.466,-160.676 h1.2
  text ".prj_part_number" at -39.512,-160.676 h1.2
  text ".prj_name_long" at 38.75,-161.535 h2.54
  text ".VariantName" at -15.645,-162.59 h1.25
  text "PCB PART NO." at -52.466,-162.782 h1.2
  text ".pcb_part_number" at -39.512,-162.782 h1.2
  text "DWG. NO." at 114.835,-163.468 h0.8 r270
  text "UNLESS OTHERWISE SPECIFIED DIMENSIONS" at -51.958,-165.449 h1.1
  text "APPROVALS" at 1.105,-165.502 h1.2
  text "DATE" at 25.949,-165.502 h1.2
  text ".pcb_title1" at 38.75,-166.708 h2.54
  text ".PCB_DWG_NO" at 113.164,-166.779 h1.27 r270
  text "AND TOLERANCE ARE IN INCHES AND" at -50.561,-167.354 h1.1
  text "DESIGNER:" at -17.523,-167.534 h1.2
  text "APPLY TO THE FINISHED PART" at -47.767,-169.132 h1.1
  text ".PCB_DESIGNER" at -15.645,-169.566 h1.25
  text ".PCB_DESIGNER_APP_DATE" at 22.647,-169.566 h1
  text ".pcb_title2" at 38.75,-171.208 h2.54
  text "TOLERANCE ON:" at -41.671,-172.307 h1.2
  text "ENGINEER:" at -17.523,-172.614 h1.2
  text ".PCB_ENGINEER_APP_DATE" at 22.647,-174.392 h1
  text "2 DEC. PLACE" at -51.958,-174.593 h1
  text "3 DEC. PLACE" at -40.401,-174.593 h1
  text "ANGLES" at -26.812,-174.593 h1
  text ".PCB_ENGINEER" at -15.645,-174.646 h1.25
  text "LICENSE:" at 34.432,-175.101 h1.2
  text "CHECKER:" at -17.523,-177.694 h1.2
  text ".PCB_2_DEC_TOL" at -50.561,-178.53 h1.5
  text ".PCB_3_DEC_TOL" at -39.512,-178.53 h1.5
  text ".PCB_ANG_TOL" at -27.701,-178.53 h1.5
  text ".prj_license" at 39,-178.96 h2.54
  text ".PCB_CHECKER_APP_DATE" at 22.596,-179.573 h1
  text ".PCB_CHECKER" at -15.645,-179.726 h1.25
  text "THIRD ANGLE PROJECTION" at -71.592,-180.056 h1
  text "MATERIAL:" at -51.958,-182.164 h1.2
  text "LAYER:" at 34.432,-183.178 h1.2
  text "REFERENCE DOCUMENTS" at -1.371,-183.282 h1.2
  text "H" at -297.049,-184.117 h1.2
  text "BOM:" at -17.523,-185.822 h1.2
  text "SEE NOTES" at -42.661,-187.219 h1.5
  text "REV:" at 114.914,-188.029 h0.8 r270
  text ".DOC_NO_BOM" at -15.395,-188.108 h1.5
  text ".prj_pcb" at 113.414,-188.279 h1.27 r270
  text "ASSY DWG:" at -17.523,-190.648 h1.2
  text ".DOC_NO_ASSY_DWG" at -15.395,-192.934 h1.5
  text "SIZE:" at 35.956,-193.77 h1.2
  text "CAGE CODE:" at 42.179,-193.77 h1.2
  text "DWG NO:" at 67.579,-193.77 h1.2
  text "REV:" at 107.203,-193.77 h1.2
  text "FAB DWG:" at -17.523,-195.474 h1.2
  text ".PCB_DWG_NO" at 72.914,-197.426 h2.54
  text ".DOC_NO_FAB_DWG" at -15.395,-197.633 h1.5
  text "A3" at 35.804,-197.695 h2.54
  text ".CAGE_CODE" at 46.497,-197.707 h2.54
  text ".prj_pcb" at 108.527,-197.695 h2.54
  text "SCHEMATIC:" at -17.523,-200.3 h1.2
  text "PRINT DATE:" at -52.161,-200.325 h1.2
  text "SCALE:" at 34.432,-201.771 h1.2
  text "FILE NAME:" at 49.799,-201.773 h1.2
  text "SHEET:" at 93.995,-201.773 h1.2
  text ".DOC_NO_SCH_DWG" at -15.395,-202.586 h1.5
  text "'.Print_Date', '.Print_Time'" at -49.586,-202.676 h1.5
  text ".PCB_FILE_NAME_NO_PATH" at 58.511,-202.916 h1.5
  text ".PCB_SCALE" at 41.29,-203.041 h1.5
  text "OF" at 105.425,-203.043 h1.2
  text "DOC-104 REV A" at -295.336,-204.723 h0.55
  text "1" at -284.049,-205.867 h1.2
  text "2" at -257.049,-205.867 h1.2
  text "3" at -232.049,-205.867 h1.2
  text "4" at -207.049,-205.867 h1.2
  text "5" at -182.049,-205.867 h1.2
  text "6" at -157.049,-205.867 h1.2
  text "7" at -132.049,-205.867 h1.2
  text "8" at -105.049,-205.867 h1.2
  text "9" at -76.049,-205.867 h1.2
  text "10" at -51.049,-205.867 h1.2
  text "11" at -26.049,-205.867 h1.2
  text "12" at -1.049,-205.867 h1.2
  text "13" at 23.951,-205.867 h1.2
  text "14" at 48.951,-205.867 h1.2
  text "15" at 73.951,-205.867 h1.2
  text "16" at 103.951,-205.867 h1.2
Bottom TitleBlock:
  drawing of 135 lines, arcs and shapes, not listed
  text "REV:" at -240.586,85.603 h0.8
  text "DWG. NO." at -216.025,85.524 h0.8
  text "16" at -286.623,85.14 h1.2
  text "15" at -256.623,85.14 h1.2
  text "13" at -206.623,85.14 h1.2
  text "12" at -181.623,85.14 h1.2
  text "11" at -156.623,85.14 h1.2
  text "10" at -131.623,85.14 h1.2
  text "9" at -106.623,85.14 h1.2
  text "8" at -77.623,85.14 h1.2
  text "7" at -50.623,85.14 h1.2
  text "6" at -25.623,85.14 h1.2
  text "5" at -0.623,85.14 h1.2
  text "4" at 24.377,85.14 h1.2
  text "3" at 49.377,85.14 h1.2
  text "2" at 74.377,85.14 h1.2
  text "1" at 101.377,85.14 h1.2
  text ".prj_pcb" at -240.836,84.103 h1.27
  text ".PCB_DWG_NO" at -219.336,83.853 h1.27
  text "R" at 64.511,81.514 h1.3
  text "O" at 65.908,81.514 h1.3
  text "N" at 67.644,81.514 h1.3
  text "I" at 68.152,81.514 h1.3
  text "E" at 69.338,81.514 h1.3
  text "R" at 70.566,81.514 h1.3
  text "E" at 71.752,81.514 h1.3
  text "H" at 73.022,81.514 h1.3
  text "D" at 74.758,81.514 h1.3
  text "E" at 75.944,81.514 h1.3
  text "S" at 77.129,81.514 h1.3
  text "O" at 78.527,81.514 h1.3
  text "L" at 79.501,81.514 h1.3
  text "C" at 80.771,81.514 h1.3
  text "S" at 81.957,81.514 h1.3
  text "I" at 82.422,81.514 h1.3
  text "D" at 83.693,81.514 h1.3
  text "A" at 85.386,81.514 h1.3
  text "T" at 86.445,81.514 h1.3
  text "A" at 87.631,81.514 h1.3
  text "D" at 88.901,81.514 h1.3
  text "E" at 90.552,81.514 h1.3
  text "H" at 91.823,81.514 h1.3
  text "T" at 92.924,81.514 h1.3
  text "D" at 94.66,81.514 h1.3
  text "N" at 95.93,81.514 h1.3
  text "A" at 97.116,81.514 h1.3
  text "T" at 98.725,81.514 h1.3
  text "N" at 99.953,81.514 h1.3
  text "E" at 101.138,81.514 h1.3
  text "M" at 102.62,81.514 h1.3
  text "U" at 103.891,81.514 h1.3
  text "C" at 105.161,81.514 h1.3
  text "O" at 106.558,81.514 h1.3
  text "D" at 107.829,81.514 h1.3
  text "S" at 109.48,81.514 h1.3
  text "I" at 109.988,81.514 h1.3
  text "H" at 111.258,81.514 h1.3
  text "T" at 112.359,81.514 h1.3
  text "REVISIONS" at -240.523,80.686 h1.5
  text "Y" at 61.868,79.481 h1.3
  text "A" at 63.011,79.481 h1.3
  text "M" at 64.493,79.481 h1.3
  text "D" at 66.272,79.481 h1.3
  text "N" at 67.542,79.481 h1.3
  text "A" at 68.727,79.481 h1.3
  text "D" at 70.464,79.481 h1.3
  text "E" at 71.649,79.481 h1.3
  text "T" at 72.75,79.481 h1.3
  text "I" at 73.258,79.481 h1.3
  text "M" at 74.698,79.481 h1.3
  text "I" at 75.206,79.481 h1.3
  text "L" at 76.18,79.481 h1.3
  text "M" at 78.128,79.481 h1.3
  text "U" at 79.398,79.481 h1.3
  text "I" at 79.906,79.481 h1.3
  text "T" at 81.007,79.481 h1.3
  text "L" at 81.939,79.481 h1.3
  text "A" at 83.124,79.481 h1.3
  text "F" at 84.733,79.481 h1.3
  text "O" at 86.088,79.481 h1.3
  text "Y" at 87.74,79.481 h1.3
  text "T" at 88.841,79.481 h1.3
  text "R" at 90.069,79.481 h1.3
  text "E" at 91.254,79.481 h1.3
  text "P" at 92.44,79.481 h1.3
  text "O" at 93.813,79.481 h1.3
  text "R" at 95.083,79.481 h1.3
  text "P" at 96.269,79.481 h1.3
  text "E" at 97.92,79.481 h1.3
  text "H" at 99.19,79.481 h1.3
  text "T" at 100.291,79.481 h1.3
  text "S" at 101.943,79.481 h1.3
  text "I" at 102.451,79.481 h1.3
  text "H" at 104.187,79.481 h1.3
  text "T" at 105.288,79.481 h1.3
  text "I" at 105.754,79.481 h1.3
  text "W" at 107.49,79.481 h1.3
  text "E" at 108.633,79.481 h1.3
  text "R" at 109.903,79.481 h1.3
  text "E" at 111.089,79.481 h1.3
  text "H" at 112.359,79.481 h1.3
  text "DATE" at -270.114,77.511 h1.5
  text "REV" at -208.646,77.511 h1.5
  text "ZONE" at -200.264,77.511 h1.5
  text "E" at 67.45,77.449 h1.3
  text "R" at 68.72,77.449 h1.3
  text "A" at 69.906,77.449 h1.3
  text "S" at 71.558,77.449 h1.3
  text "T" at 72.658,77.449 h1.3
  text "H" at 73.886,77.449 h1.3
  text "G" at 75.284,77.449 h1.3
  text "I" at 75.792,77.449 h1.3
  text "R" at 77.02,77.449 h1.3
  text "O" at 78.925,77.449 h1.3
  text "N" at 80.196,77.449 h1.3
  text "." at 81.17,77.449 h1.3
  text "E" at 82.355,77.449 h1.3
  text "L" at 83.329,77.449 h1.3
  text "O" at 84.726,77.449 h1.3
  text "H" at 85.954,77.449 h1.3
  text "W" at 87.69,77.449 h1.3
  text "N" at 89.384,77.449 h1.3
  text "I" at 89.892,77.449 h1.3
  text "D" at 91.628,77.449 h1.3
  text "E" at 92.814,77.449 h1.3
  text "T" at 93.915,77.449 h1.3
  text "U" at 95.185,77.449 h1.3
  text "B" at 96.371,77.449 h1.3
  text "I" at 96.879,77.449 h1.3
  text "R" at 98.107,77.449 h1.3
  text "T" at 99.19,77.449 h1.3
  text "S" at 100.376,77.449 h1.3
  text "I" at 100.842,77.449 h1.3
  text "D" at 102.112,77.449 h1.3
  text "Y" at 103.806,77.449 h1.3
  text "L" at 104.78,77.449 h1.3
  text "E" at 105.965,77.449 h1.3
  text "E" at 107.109,77.449 h1.3
  text "R" at 108.379,77.449 h1.3
  text "F" at 109.48,77.449 h1.3
  text "E" at 111.174,77.449 h1.3
  text "B" at 112.359,77.449 h1.3
  text "APPROVED" at -282.941,77.384 h1.5
  text "DESCRIPTION" at -234.427,77.384 h1.5
  text "." at 63.59,75.416 h1.3
  text "N" at 64.818,75.416 h1.3
  text "E" at 66.004,75.416 h1.3
  text "V" at 67.189,75.416 h1.3
  text "I" at 67.698,75.416 h1.3
  text "G" at 69.095,75.416 h1.3
  text "E" at 70.651,75.416 h1.3
  text "E" at 71.836,75.416 h1.3
  text "T" at 72.937,75.416 h1.3
  text "N" at 74.165,75.416 h1.3
  text "A" at 75.351,75.416 h1.3
  text "R" at 76.621,75.416 h1.3
  text "A" at 77.807,75.416 h1.3
  text "W" at 79.543,75.416 h1.3
  text "D" at 81.237,75.416 h1.3
  text "E" at 82.422,75.416 h1.3
  text "I" at 82.93,75.416 h1.3
  text "L" at 83.862,75.416 h1.3
  text "P" at 85.048,75.416 h1.3
  text "M" at 86.53,75.416 h1.3
  text "I" at 87.038,75.416 h1.3
  text "R" at 88.774,75.416 h1.3
  text "O" at 90.171,75.416 h1.3
  text "S" at 91.823,75.416 h1.3
  text "S" at 93.008,75.416 h1.3
  text "E" at 94.194,75.416 h1.3
  text "R" at 95.464,75.416 h1.3
  text "P" at 96.65,75.416 h1.3
  text "X" at 97.793,75.416 h1.3
  text "E" at 98.979,75.416 h1.3
  text "R" at 100.757,75.416 h1.3
  text "O" at 102.154,75.416 h1.3
  text "D" at 103.891,75.416 h1.3
  text "E" at 105.076,75.416 h1.3
  text "V" at 106.262,75.416 h1.3
  text "R" at 107.532,75.416 h1.3
  text "E" at 108.718,75.416 h1.3
  text "S" at 109.903,75.416 h1.3
  text "E" at 111.089,75.416 h1.3
  text "R" at 112.359,75.416 h1.3
  text "ORIGINAL" at -236.332,74.082 h1.5
  text "A" at -209.408,74.082 h1.5
  text "A" at -297.623,64.14 h1.2
  text "A" at 114.377,64.14 h1.2
  text "B" at -297.623,31.14 h1.2
  text "B" at 114.377,31.14 h1.2
  text "C" at -297.623,-4.735 h1.2
  text "C" at 114.377,-4.735 h1.2
  text "D" at -297.623,-40.61 h1.2
  text "D" at 114.377,-40.61 h1.2
  text "E" at -297.623,-76.485 h1.2
  text "E" at 114.377,-76.485 h1.2
  text "F" at -297.623,-112.36 h1.2
  text "F" at 114.377,-112.36 h1.2
  text "DATE" at -208.62,-147.798 h1.2
  text "PROJECT" at -183.776,-147.798 h1.2
  text ".pcb_organization" at -264.983,-147.872 h1.2
  text "G" at -297.623,-148.235 h1.2
  text "G" at 114.377,-148.235 h1.2
  text "BOARD:" at -165.148,-149.83 h1.2
  text ".pcb_address1" at -264.983,-150.158 h1.2
  text ".prj_date" at -205.318,-151.862 h1
  text ".prj_name" at -167.026,-151.862 h1.25
  text ".pcb_address2" at -264.983,-152.444 h1.2
  text "'.pcb_address3' - '.pcb_address4'" at -264.983,-154.73 h1.2
  text "STATUS:" at -165.148,-154.91 h1.2
  text "-  '.prj_status' -" at -167.076,-157.34 h1.5
  text "TITLE:" at -217.104,-157.725 h1.2
  text "VARIANT:" at -165.148,-159.99 h1.2
  text ".prj_part_number" at -143.16,-160.676 h1.2
  text "PART NO." at -130.206,-160.676 h1.2
  text ".prj_name_long" at -221.422,-161.535 h2.54
  text ".VariantName" at -167.026,-162.59 h1.25
  text ".pcb_part_number" at -143.16,-162.782 h1.2
  text "PCB PART NO." at -130.206,-162.782 h1.2
  text "DWG. NO." at -297.507,-163.462 h0.8 r90
  text "UNLESS OTHERWISE SPECIFIED DIMENSIONS" at -130.714,-165.449 h1.1
  text "DATE" at -208.62,-165.502 h1.2
  text "APPROVALS" at -183.776,-165.502 h1.2
  text ".pcb_title1" at -221.422,-166.708 h2.54
  text ".PCB_DWG_NO" at -295.836,-166.772 h1.27 r90
  text "AND TOLERANCE ARE IN INCHES AND" at -132.111,-167.354 h1.1
  text "DESIGNER:" at -165.148,-167.534 h1.2
  text "APPLY TO THE FINISHED PART" at -134.905,-169.132 h1.1
  text ".PCB_DESIGNER_APP_DATE" at -205.318,-169.566 h1
  text ".PCB_DESIGNER" at -167.026,-169.566 h1.25
  text ".pcb_title2" at -221.422,-171.208 h2.54
  text "TOLERANCE ON:" at -141.001,-172.307 h1.2
  text "ENGINEER:" at -165.148,-172.614 h1.2
  text ".PCB_ENGINEER_APP_DATE" at -205.318,-174.392 h1
  text "ANGLES" at -155.86,-174.593 h1
  text "3 DEC. PLACE" at -142.271,-174.593 h1
  text "2 DEC. PLACE" at -130.714,-174.593 h1
  text ".PCB_ENGINEER" at -167.026,-174.646 h1.25
  text "LICENSE:" at -217.104,-175.101 h1.2
  text "CHECKER:" at -165.148,-177.694 h1.2
  text ".PCB_ANG_TOL" at -154.971,-178.53 h1.5
  text ".PCB_3_DEC_TOL" at -143.16,-178.53 h1.5
  text ".PCB_2_DEC_TOL" at -132.111,-178.53 h1.5
  text ".prj_license" at -221.672,-178.96 h2.54
  text ".PCB_CHECKER_APP_DATE" at -205.267,-179.573 h1
  text ".PCB_CHECKER" at -167.026,-179.726 h1.25
  text "THIRD ANGLE PROJECTION" at -111.08,-180.056 h1
  text "MATERIAL:" at -130.714,-182.164 h1.2
  text "LAYER:" at -217.104,-183.178 h1.2
  text "REFERENCE DOCUMENTS" at -181.3,-183.282 h1.2
  text "H" at 114.377,-184.11 h1.2
  text "BOM:" at -165.148,-185.822 h1.2
  text "SEE NOTES" at -140.01,-187.219 h1.5
  text "REV:" at -297.586,-188.022 h0.8 r90
  text ".DOC_NO_BOM" at -167.276,-188.108 h1.5
  text ".prj_pcb" at -296.086,-188.272 h1.27 r90
  text "ASSY DWG:" at -165.148,-190.648 h1.2
  text ".DOC_NO_ASSY_DWG" at -167.276,-192.934 h1.5
  text "REV:" at -289.875,-193.77 h1.2
  text "DWG NO:" at -250.251,-193.77 h1.2
  text "CAGE CODE:" at -224.851,-193.77 h1.2
  text "SIZE:" at -218.628,-193.77 h1.2
  text "FAB DWG:" at -165.148,-195.474 h1.2
  text ".PCB_DWG_NO" at -255.586,-197.426 h2.54
  text ".DOC_NO_FAB_DWG" at -167.276,-197.633 h1.5
  text ".prj_pcb" at -291.198,-197.695 h2.54
  text ".CAGE_CODE" at -229.169,-197.707 h2.54
  text "A3" at -218.476,-197.695 h2.54
  text "SCHEMATIC:" at -165.148,-200.3 h1.2
  text "PRINT DATE:" at -130.511,-200.325 h1.2
  text "SHEET:" at -276.667,-201.773 h1.2
  text "FILE NAME:" at -232.471,-201.773 h1.2
  text "SCALE:" at -217.104,-201.771 h1.2
  text ".DOC_NO_SCH_DWG" at -167.276,-202.586 h1.5
  text "'.Print_Date', '.Print_Time'" at -133.086,-202.676 h1.5
  text ".PCB_FILE_NAME_NO_PATH" at -241.183,-202.916 h1.5
  text "OF" at -288.097,-203.043 h1.2
  text ".PCB_SCALE" at -223.962,-203.041 h1.5
  text "DOC-104 REV A" at 112.664,-204.717 h0.55
  text "16" at -286.623,-205.86 h1.2
  text "15" at -256.623,-205.86 h1.2
  text "14" at -231.623,-205.86 h1.2
  text "13" at -206.623,-205.86 h1.2
  text "12" at -181.623,-205.86 h1.2
  text "11" at -156.623,-205.86 h1.2
  text "10" at -131.623,-205.86 h1.2
  text "9" at -106.623,-205.86 h1.2
  text "8" at -77.623,-205.86 h1.2
  text "7" at -50.623,-205.86 h1.2
  text "6" at -25.623,-205.86 h1.2
  text "5" at -0.623,-205.86 h1.2
  text "4" at 24.377,-205.86 h1.2
  text "3" at 49.377,-205.86 h1.2
  text "2" at 74.377,-205.86 h1.2
  text "1" at 101.377,-205.86 h1.2
PCB Note Panel:
  drawing of 207 lines, arcs and shapes, not listed
  text "Layer" at -279.562,-12.926 h1.5
  text "Name" at -270.756,-12.926 h1.5
  text "Material" at -244.069,-12.926 h1.5
  text "Thickness" at -230.435,-12.926 h1.5
  text "Constant" at -217.408,-12.926 h1.5
  text "Board Layer Stack" at -204.989,-12.926 h1.5
  text "Top Overlay" at -270.756,-15.926 h1.5
  text "Top Solder" at -270.756,-18.926 h1.5
  text "SM-001" at -244.069,-18.926 h1.5
  text "0,025mm" at -230.435,-18.926 h1.5
  text "4" at -217.408,-18.926 h1.5
  text "Top Copper Plating" at -270.756,-21.926 h1.5
  text "PbSn" at -244.069,-21.926 h1.5
  text "0,020mm" at -230.435,-21.926 h1.5
  text "1" at -279.562,-24.926 h1.5
  text "Top Layer" at -270.756,-24.926 h1.5
  text "CF-004" at -244.069,-24.926 h1.5
  text "0,035mm" at -230.435,-24.926 h1.5
  text "Dielectric 1" at -270.756,-27.926 h1.5
  text "Core-043" at -244.069,-27.926 h1.5
  text "1,499mm" at -230.435,-27.926 h1.5
  text "4.3" at -217.408,-27.926 h1.5
  text "2" at -279.562,-30.926 h1.5
  text "Bottom Layer" at -270.756,-30.926 h1.5
  text "CF-004" at -244.069,-30.926 h1.5
  text "0,035mm" at -230.435,-30.926 h1.5
  text "Bottom Copper Plating" at -270.756,-33.926 h1.5
  text "PbSn" at -244.069,-33.926 h1.5
  text "0,020mm" at -230.435,-33.926 h1.5
  text "Bottom Solder" at -270.756,-36.926 h1.5
  text "SM-001" at -244.069,-36.926 h1.5
  text "0,025mm" at -230.435,-36.926 h1.5
  text "4" at -217.408,-36.926 h1.5
  text "Bottom Overlay" at -270.756,-39.926 h1.5
Drawing3:
  drawing of 3007 lines, arcs and shapes, not listed

## Text inside footprints (layer, text, board x,y; h text height)
K00_D1: Note Top "k" at -6.5,54.9 h0.5 r90; Assembly Top "k" at -6.5,54.9 h0.5 r90
K00_S1: Note Top "1" at -4.1,3.79 h0.8; Assembly Top "1" at -4.1,3.79 h0.8
K01_D1: Note Top "k" at -9,56.9 h0.5 r90; Assembly Top "k" at -9,56.9 h0.5 r90
K01_S1: Note Top "1" at -4.1,-15.21 h0.8; Assembly Top "1" at -4.1,-15.21 h0.8
K02_D1: Note Top "k" at -11.5,58.9 h0.5 r90; Assembly Top "k" at -11.5,58.9 h0.5 r90
K02_S1: Note Top "1" at -4.1,-34.21 h0.8; Assembly Top "1" at -4.1,-34.21 h0.8
K03_D1: Note Top "k" at -14,60.9 h0.5 r90; Assembly Top "k" at -14,60.9 h0.5 r90
K03_S1: Note Top "1" at -4.1,-53.21 h0.8; Assembly Top "1" at -4.1,-53.21 h0.8
K10_D1: Note Top "k" at 12.5,54.9 h0.5 r90; Assembly Top "k" at 12.5,54.9 h0.5 r90
K10_S1: Note Top "1" at 14.9,3.79 h0.8; Assembly Top "1" at 14.9,3.79 h0.8
K11_D1: Note Top "k" at 10,56.9 h0.5 r90; Assembly Top "k" at 10,56.9 h0.5 r90
K11_S1: Note Top "1" at 14.9,-15.21 h0.8; Assembly Top "1" at 14.9,-15.21 h0.8
K12_D1: Note Top "k" at 7.5,58.9 h0.5 r90; Assembly Top "k" at 7.5,58.9 h0.5 r90
K12_S1: Note Top "1" at 14.9,-34.21 h0.8; Assembly Top "1" at 14.9,-34.21 h0.8
K13_D1: Note Top "k" at 5,60.9 h0.5 r90; Assembly Top "k" at 5,60.9 h0.5 r90
K13_S1: Note Top "1" at 14.9,-53.21 h0.8; Assembly Top "1" at 14.9,-53.21 h0.8
K14_D1: Note Top "k" at 2.5,62.9 h0.5 r90; Assembly Top "k" at 2.5,62.9 h0.5 r90
K14_S1: Note Top "1" at 10.15,-74.21 h0.8; Assembly Top "1" at 10.15,-74.21 h0.8
K20_D1: Note Top "k" at 31.5,54.9 h0.5 r90; Assembly Top "k" at 31.5,54.9 h0.5 r90
K20_S1: Note Top "1" at 33.9,3.79 h0.8; Assembly Top "1" at 33.9,3.79 h0.8
K21_D1: Note Top "k" at 29,56.9 h0.5 r90; Assembly Top "k" at 29,56.9 h0.5 r90
K21_S1: Note Top "1" at 33.9,-15.21 h0.8; Assembly Top "1" at 33.9,-15.21 h0.8
K22_D1: Note Top "k" at 26.5,58.9 h0.5 r90; Assembly Top "k" at 26.5,58.9 h0.5 r90
K22_S1: Note Top "1" at 33.9,-34.21 h0.8; Assembly Top "1" at 33.9,-34.21 h0.8
K23_D1: Note Top "k" at 24,60.9 h0.5 r90; Assembly Top "k" at 24,60.9 h0.5 r90
K23_S1: Note Top "1" at 33.9,-53.21 h0.8; Assembly Top "1" at 33.9,-53.21 h0.8
K24_D1: Note Top "k" at 21.5,62.9 h0.5 r90; Assembly Top "k" at 21.5,62.9 h0.5 r90
K24_S1: Note Top "1" at 41.15,-74.21 h0.8; Assembly Top "1" at 41.15,-74.21 h0.8
K30_D1: Note Top "k" at 50.5,54.9 h0.5 r90; Assembly Top "k" at 50.5,54.9 h0.5 r90
K30_S1: Note Top "1" at 52.9,3.79 h0.8; Assembly Top "1" at 52.9,3.79 h0.8
K31_D1: Note Top "k" at 48,56.9 h0.5 r90; Assembly Top "k" at 48,56.9 h0.5 r90
K31_S1: Note Top "1" at 52.9,-15.21 h0.8; Assembly Top "1" at 52.9,-15.21 h0.8
K32_D1: Note Top "k" at 45.5,58.9 h0.5 r90; Assembly Top "k" at 45.5,58.9 h0.5 r90
K32_S1: Note Top "1" at 52.9,-34.21 h0.8; Assembly Top "1" at 52.9,-34.21 h0.8
K33_D1: Note Top "k" at 43,60.9 h0.5 r90; Assembly Top "k" at 43,60.9 h0.5 r90
K33_S1: Note Top "1" at 52.9,-53.21 h0.8; Assembly Top "1" at 52.9,-53.21 h0.8
K40_D1: Note Top "k" at 69.75,54.9 h0.5 r90; Assembly Top "k" at 69.75,54.9 h0.5 r90
K40_S1: Note Top "1" at 71.9,3.79 h0.8; Assembly Top "1" at 71.9,3.79 h0.8
K41_D1: Note Top "k" at 67.25,56.9 h0.5 r90; Assembly Top "k" at 67.25,56.9 h0.5 r90
K41_S1: Note Top "1" at 71.9,-15.21 h0.8; Assembly Top "1" at 71.9,-15.21 h0.8
K42_D1: Note Top "k" at 64.75,58.9 h0.5 r90; Assembly Top "k" at 64.75,58.9 h0.5 r90
K42_S1: Note Top "1" at 71.9,-34.21 h0.8; Assembly Top "1" at 71.9,-34.21 h0.8
K43_D1: Note Top "k" at 62.25,60.9 h0.5 r90; Assembly Top "k" at 62.25,60.9 h0.5 r90
K43_S1: Note Top "1" at 71.9,-53.21 h0.8; Assembly Top "1" at 71.9,-53.21 h0.8
K44_D1: Note Top "k" at 59.75,62.9 h0.5 r90; Assembly Top "k" at 59.75,62.9 h0.5 r90
K44_S1: Note Top "1" at 64.9,-74.21 h0.8; Assembly Top "1" at 64.9,-74.21 h0.8
K50_D1: Note Top "k" at 88.75,54.9 h0.5 r90; Assembly Top "k" at 88.75,54.9 h0.5 r90
K50_S1: Note Top "1" at 90.9,3.79 h0.8; Assembly Top "1" at 90.9,3.79 h0.8
K51_D1: Note Top "k" at 86.25,56.9 h0.5 r90; Assembly Top "k" at 86.25,56.9 h0.5 r90
K51_S1: Note Top "1" at 90.9,-15.21 h0.8; Assembly Top "1" at 90.9,-15.21 h0.8
K52_D1: Note Top "k" at 83.75,58.9 h0.5 r90; Assembly Top "k" at 83.75,58.9 h0.5 r90
K52_S1: Note Top "1" at 90.9,-34.21 h0.8; Assembly Top "1" at 90.9,-34.21 h0.8
K53_D1: Note Top "k" at 81.25,60.9 h0.5 r90; Assembly Top "k" at 81.25,60.9 h0.5 r90
K53_S1: Note Top "1" at 93.65,-53.21 h0.8; Assembly Top "1" at 93.65,-53.21 h0.8
K60_D1: Note Top "k" at 107.75,54.9 h0.5 r90; Assembly Top "k" at 107.75,54.9 h0.5 r90
K60_S1: Note Top "1" at 109.9,3.79 h0.8; Assembly Top "1" at 109.9,3.79 h0.8
K61_D1: Note Top "k" at 105.25,56.9 h0.5 r90; Assembly Top "k" at 105.25,56.9 h0.5 r90
K61_S1: Note Top "1" at 109.9,-15.21 h0.8; Assembly Top "1" at 109.9,-15.21 h0.8
K62_D1: Note Top "k" at 102.75,58.9 h0.5 r90; Assembly Top "k" at 102.75,58.9 h0.5 r90
K62_S1: Note Top "1" at 109.9,-34.21 h0.8; Assembly Top "1" at 109.9,-34.21 h0.8
K64_D1: Note Top "k" at 98,62.9 h0.5 r90; Assembly Top "k" at 98,62.9 h0.5 r90
K64_S1: Note Top "1" at 114.9,-76.96 h0.8; Assembly Top "1" at 114.9,-76.96 h0.8
K70_D1: Note Top "k" at 136.25,54.9 h0.5 r90; Assembly Top "k" at 136.25,54.9 h0.5 r90
K70_S1: Note Top "1" at 138.55,3.79 h0.8; Assembly Top "1" at 138.55,3.79 h0.8
K72_D1: Note Top "k" at 131.25,58.9 h0.5 r90; Assembly Top "k" at 131.25,58.9 h0.5 r90
K72_S1: Note Top "1" at 136.4,-24.71 h0.8; Assembly Top "1" at 136.4,-24.71 h0.8
K73_D1: Note Top "k" at 128.75,60.9 h0.5 r90; Assembly Top "k" at 128.75,60.9 h0.5 r90
K73_S1: Note Top "1" at 133.9,-57.96 h0.8; Assembly Top "1" at 133.9,-57.96 h0.8
K74_D1: Note Top "k" at 126.25,62.9 h0.5 r90; Assembly Top "k" at 126.25,62.9 h0.5 r90
K74_S1: Note Top "1" at 133.9,-76.96 h0.8; Assembly Top "1" at 133.9,-76.96 h0.8
K81_D1: Note Top "k" at 165,56.9 h0.5 r90; Assembly Top "k" at 165,56.9 h0.5 r90
K81_S1: Note Top "1" at 166.9,-15.21 h0.8; Assembly Top "1" at 166.9,-15.21 h0.8
K82_D1: Note Top "k" at 162.5,58.9 h0.5 r90; Assembly Top "k" at 162.5,58.9 h0.5 r90
K82_S1: Note Top "1" at 166.9,-34.21 h0.8; Assembly Top "1" at 166.9,-34.21 h0.8
K84_D1: Note Top "k" at 155,62.9 h0.5 r90; Assembly Top "k" at 155,62.9 h0.5 r90
K84_S1: Note Top "1" at 153.15,-76.96 h0.8; Assembly Top "1" at 153.15,-76.96 h0.8